# EAGLE board Brilliant Snicket (EAGLE 9.7.0)

Size 122.85 x 81.74 mm. Coordinates in mm from the lower left corner, seen from the top.
Outline: 0,0 122.85,0 122.85,81.75 0,81.75 0,0
Copper layers (1*16): Top 0.035mm / dielectric 1.5mm / Bottom 0.035mm
Design rules "default": minimum track width 6mil, minimum drill 0.35mm, track to track 6mil, track to pad 6mil, pad to pad 6mil, via to via 6mil, smd to smd 6mil, copper to edge 40mil, drill to drill 6mil, minimum pad ring 10mil, minimum via ring 8mil, stop-mask expansion 4mil, vias tented up to drill 0mil, thermal gap 10mil

## Footprints (pad centres in the part's own frame; a part is rotated, then mirrored left to right if it is on the bottom)
LEDRD254W60D565H860B_G = drill 0.981 pad 1.581: 1 -1.27,0; 2 1.27,0
LEDRD254W60D565H860B = drill 0.981 pad 1.581: 1 -1.27,0; 2 1.27,0
LEDRD254W60D565H860B_Y = drill 0.981 pad 1.581: 1 -1.27,0; 2 1.27,0
RESAD1016W63L850D250B = drill 0.83 pad 1.43: 1 -5.08,0; 2 5.08,0
ARDUINO-UNO-R3-SHIELD = drill 1.016 pad 1.88: 3.3V 24.13,-2.54; 5V 24.13,0; A0 24.13,12.7; A1 24.13,15.24; A2 24.13,17.78; A3 24.13,20.32; A4 24.13,22.86; A5 24.13,25.4; AREF -24.13,-13.97; D2 -24.13,20.32; D3 -24.13,17.78; D4 -24.13,15.24; D5 -24.13,12.7; D6 -24.13,10.16; D7 -24.13,7.62; D8 -24.13,3.81; D9 -24.13,1.27; D10 -24.13,-1.27; D11 -24.13,-3.81; D12 -24.13,-6.35; D13 -24.13,-8.89; GND@0 24.13,2.54; GND@1 24.13,5.08; GND@2 -24.13,-11.43; IOREF 24.13,-7.62; NC 24.13,-10.16; RES 24.13,-5.08; RX -24.13,25.4; SCL -24.13,-19.05; SDA -24.13,-16.51; TX -24.13,22.86; VIN 24.13,7.62

## Placement (x,y rotation side)
DGREEN  GREEN  [LEDRD254W60D565H860B_G]  22.84,21.67 180 top
DRED  RED  [LEDRD254W60D565H860B]  7.6,21.67 180 top
DYELLOW  YELLOW  [LEDRD254W60D565H860B_Y]  15.22,21.67 180 top
R3  180k  [RESAD1016W63L850D250B]  13.95,8.97 90 top
RRES_1  180k  [RESAD1016W63L850D250B]  6.33,8.97 90 top
RRES_3  180k  [RESAD1016W63L850D250B]  21.57,8.97 90 top
UARDUINO  ARDUINO-UNO-R3-SHIELD  [ARDUINO-UNO-R3-SHIELD]  88.33,51.9 270 top

## Library data of the parts
DGREEN = Tinkercad; CATEGORY: Opto-Electronic; SUB-CATEGORY: LED; VALUE: LED_GREEN
DRED = Tinkercad; CATEGORY: Opto-Electronic; SUB-CATEGORY: LED; VALUE: LED_RED
DYELLOW = Tinkercad; CATEGORY: Opto-Electronic; SUB-CATEGORY: LED; VALUE: LED_YELLOW
R3 RRES_1 RRES_3 UARDUINO = Tinkercad

## Nets
DGREEN_C: DGREEN.2 RRES_3.2
DRED_C: DRED.2 RRES_1.2
DYELLOW_C: DYELLOW.2 R3.2
UARDUINO_D7: DGREEN.1 UARDUINO.D7
UARDUINO_D10: DYELLOW.1 UARDUINO.D10
UARDUINO_D13: DRED.1 UARDUINO.D13
UARDUINO_GND: R3.1 RRES_1.1 RRES_3.1 UARDUINO.GND@0 UARDUINO.GND@1 UARDUINO.GND@2

## Tracks (layer width: path | path; a pad name or v marks a point on that pad's centre or on a via)
DGREEN_C  (1 unrouted)
DRED_C  (1 unrouted)
DYELLOW_C  (1 unrouted)
UARDUINO_D7  (1 unrouted)
UARDUINO_D10  (1 unrouted)
UARDUINO_D13  (1 unrouted)
UARDUINO_GND  (5 unrouted)